# EAGLE board M24C64_v1 (EAGLE 6.1)
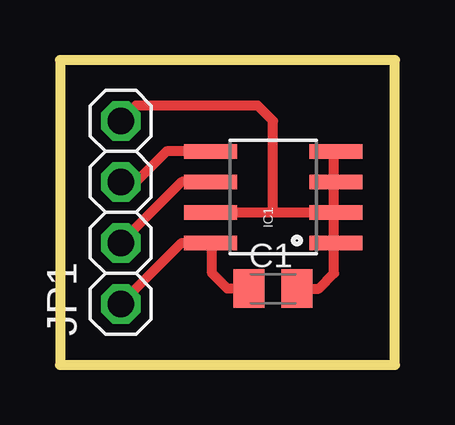
[diagram p0: board, top side]

Size 13.97 x 12.7 mm. Coordinates in mm from the lower left corner, seen from the top.
Outline: 0,0 13.97,0 13.97,12.7 0,12.7 0,0
Copper layers (1*16): Top 0.035mm / dielectric 1.5mm / Bottom 0.035mm
Design rules: minimum track width 10mil, minimum drill 24mil, track to track 8mil, track to pad 8mil, pad to pad 8mil, via to via 8mil, smd to smd 8mil, copper to edge 40mil, drill to drill 8mil, minimum pad ring 10mil, minimum via ring 8mil, stop-mask expansion 4mil, vias tented up to drill 0mil, thermal gap 10mil

## Footprints (pad centres in the part's own frame; a part is rotated, then mirrored left to right if it is on the bottom)
C0805K = smd 1.3 x 1.6: 1 -1,0; 2 1,0
SO08 = smd 0.61 x 2.21: 1 -1.905,-2.616; 2 -0.635,-2.616; 3 0.635,-2.616; 4 1.905,-2.616; 5 1.905,2.616; 6 0.635,2.616; 7 -0.635,2.616; 8 -1.905,2.616
1X04 = drill 1.1 octagon: 1 -3.81,0; 2 -1.27,0; 3 1.27,0; 4 3.81,0

## Placement (x,y rotation side)
C1  [C0805K]  8.89,3.17 0 top
IC1  M24C64  [SO08]  8.89,6.99 90 top
JP1  [1X04]  2.54,6.35 90 top

## Library data of the parts
C1 IC1 JP1 = mark_1

## Nets
+5V: C1.1 IC1.8 JP1.1
GND: C1.2 IC1.1 IC1.2 IC1.3 IC1.4 IC1.7 JP1.4
SCL: IC1.6 JP1.2
SDA: IC1.5 JP1.3

## Tracks (layer width: path | path; a pad name or v marks a point on that pad's centre or on a via)
+5V
  Top 0.406: JP1.1 5.08,5.08 IC1.8 6.35,5 6.35,3.81 6.99,3.17 C1.1
GND
  Top 0.406: 8.89,6.35 11.43,6.35 | C1.2 10.79,3.17 11.43,3.81 11.43,5 IC1.1 11.43,5.08 11.43,6.27 IC1.2 11.43,6.35 | 11.43,6.35 11.43,7.54 IC1.3 11.43,7.62 11.43,8.81 IC1.4 | IC1.7 8.89,6.35 | 8.89,6.35 8.89,10.16 8.26,10.79 3.17,10.79 JP1.4
SCL
  Top 0.406: IC1.6 5.08,7.62 JP1.2
SDA
  Top 0.406: IC1.5 4.45,8.89 3.17,7.62 JP1.3